# EAGLE board Design (EAGLE 9.3.1)
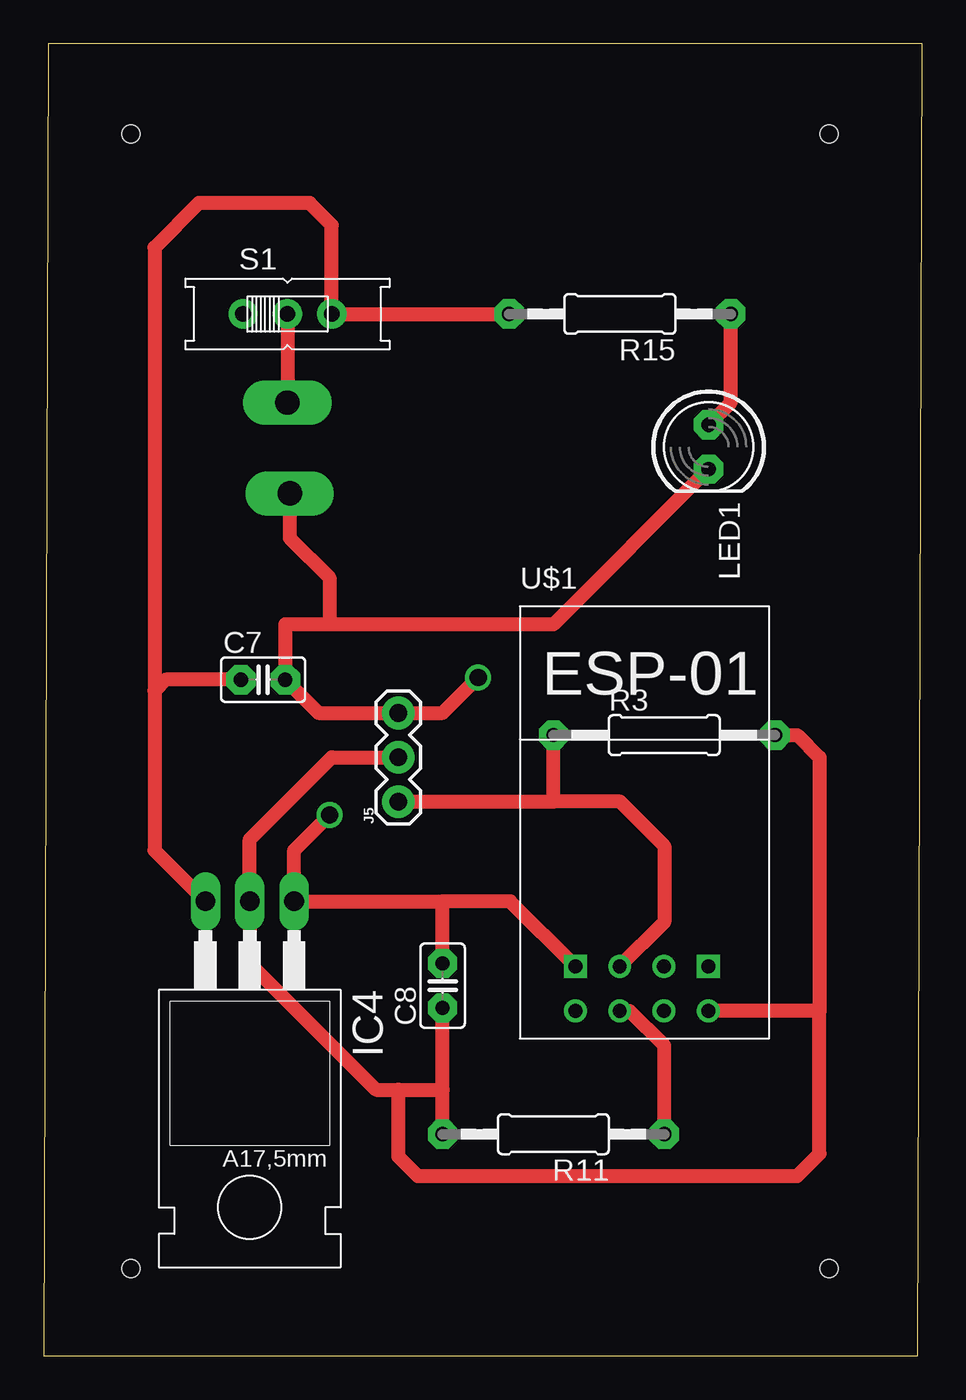
[diagram p0: board, top side]
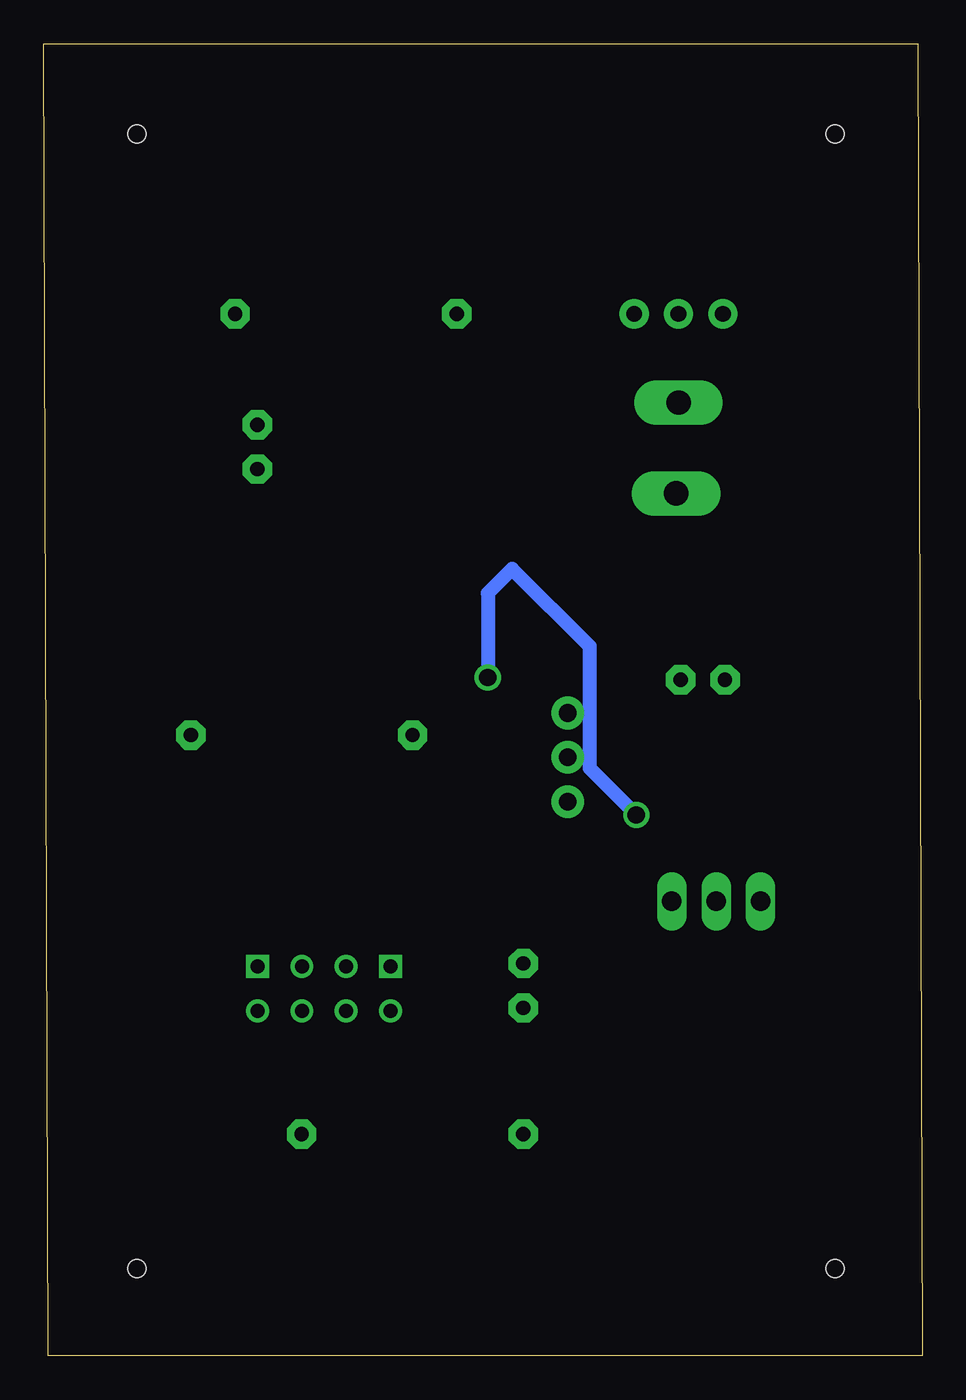
[diagram p1: board, bottom side, seen from below]

Size 50.34 x 75.17 mm. Coordinates in mm from the lower left corner, seen from the top.
Outline: 0,0 50.09,0 50.34,75.17 0.25,75.17 0,0
Copper layers (1*16): Top 0.035mm / dielectric 1.5mm / Bottom 0.035mm
Design rules "default": minimum track width 6mil, minimum drill 0.35mm, track to track 6mil, track to pad 6mil, pad to pad 6mil, via to via 6mil, smd to smd 6mil, copper to edge 40mil, drill to drill 6mil, minimum pad ring 10mil, minimum via ring 8mil, stop-mask expansion 4mil, vias tented up to drill 0mil, thermal gap 10mil
Holes 1 mm at 5,70 45,70 45,5 5,5

## Footprints (pad centres in the part's own frame; a part is rotated, then mirrored left to right if it is on the bottom)
C025-025X050 = drill 0.813 pad 1.676 octagon: 1 -1.27,0; 2 1.27,0
TO220 = drill 1.118 long: 1 -2.54,-6.35; 2 0,-6.35; 3 2.54,-6.35
1X03 = drill 1.016 pad 1.88: 1 0,0; 2 2.54,0; 3 5.08,0
1X1-BIGPOGO = drill 1.4 pad 2.54 long: P$1 0,0
LED5MM = drill 0.813 pad 1.676 octagon: A -1.27,0; K 1.27,0
0207/12 = drill 0.813 pad 1.676 octagon: 1 -6.35,0; 2 6.35,0
EG1218 = drill 0.9 pad 1.676: O -2.54,0; P 0,0; S 2.54,0
ESP01 = drill 0.8: CH_PD -1.285,-8.178; GPIO0 1.255,-5.638; GPIO2 -1.285,-5.638; RST 1.255,-8.178; TX -3.825,-8.178; VCC 3.795,-8.178 | drill 0.8 square: GND -3.825,-5.638; RX 3.795,-5.638

## Placement (x,y rotation side)
C7  10uF  [C025-025X050]  12.57,38.73 0 top
C8  10uF  [C025-025X050]  22.86,21.21 90 top
IC4  LM1117T-ADJ  [TO220]  11.81,19.68 180 top
J5  1x3 RA Female .1"  [1X03]  20.32,31.75 90 top
JP1  5V_SUPPLY  [1X1-BIGPOGO]  13.97,54.61 0 top
JP2  GND  [1X1-BIGPOGO]  14.1,49.4 0 top
LED1  GREEN  [LED5MM]  38.1,52.07 270 top
R3  10k  [0207/12]  35.56,35.56 0 top
R11  10k  [0207/12]  29.21,12.7 180 top
R15  470  [0207/12]  33.02,59.69 180 top
S1  SWITCH  [EG1218]  13.97,59.69 0 top
U$1  ESP01  [ESP01]  34.29,27.94 0 top

## Library data of the parts
C7 C8 JP1 JP2 LED1 R3 R11 R15 S1 = adafruit
IC4 = lm1117
J5 = SparkFun-Connectors
U$1 = esp8266modules

## Nets
+3V3: C8.1 IC4.2 J5.2 R3.2 R11.2 U$1.VCC
+5V: C7.1 IC4.3 R15.2 S1.S
GND: C7.2 C8.2 IC4.1 J5.3 JP2.P$1 LED1.K U$1.GND
GPIO2: J5.1 R3.1 U$1.GPIO2
N$5: JP1.P$1 S1.P
N$6: R11.1 U$1.CH_PD
N$19: LED1.A R15.1

## Tracks (layer width: path | path; a pad name or v marks a point on that pad's centre or on a via)
+3V3
  Top 0.813: R3.2 43.18,35.56 44.45,34.29 44.45,19.76 | 44.45,19.76 U$1.VCC | R11.2 22.86,15.24 | 20.32,15.24 19.05,15.24 11.81,22.48 IC4.2 11.81,29.59 16.51,34.29 J5.2 | 20.32,15.24 22.86,15.24 | 20.32,15.24 20.32,11.43 21.44,10.31 43.18,10.31 44.45,11.58 44.45,19.76 | 22.86,15.24 C8.1
+5V
  Top 0.813: R15.2 S1.S 16.51,64.77 15.24,66.04 8.89,66.04 6.35,63.5 6.35,38.1 | 6.35,38.1 6.35,28.96 IC4.3 | C7.1 6.99,38.73 6.35,38.1
GND  (via drill 1 pad 1.3)
  Top 0.813: U$1.GND 26.73,26.04 22.86,26.04 | JP2.P$1 14.1,46.86 16.38,44.58 16.38,41.91 | 22.86,26.04 IC4.1 14.35,28.96 v16.38,30.99 | C8.2 22.86,26.04 | LED1.K 29.21,41.91 16.38,41.91 | 16.38,41.91 13.84,41.91 C7.2 15.75,36.83 J5.3 22.86,36.83 v24.89,38.86
  Bottom 0.813: v16.38,30.99 19.05,33.66 19.05,40.64 23.5,45.09 24.89,43.69 v24.89,38.86
GPIO2
  Top 0.813: U$1.GPIO2 35.56,24.86 35.56,29.21 33.02,31.75 29.21,31.75 | J5.1 29.21,31.75 | 29.21,31.75 R3.1
N$5
  Top 0.813: S1.P JP1.P$1
N$6
  Top 0.813: R11.1 35.56,17.78 33.58,19.76 U$1.CH_PD
N$19
  Top 0.813: R15.1 39.37,54.61 LED1.A